# EAGLE board FX I2C Proto Shield v1.0 (EAGLE 6.4)
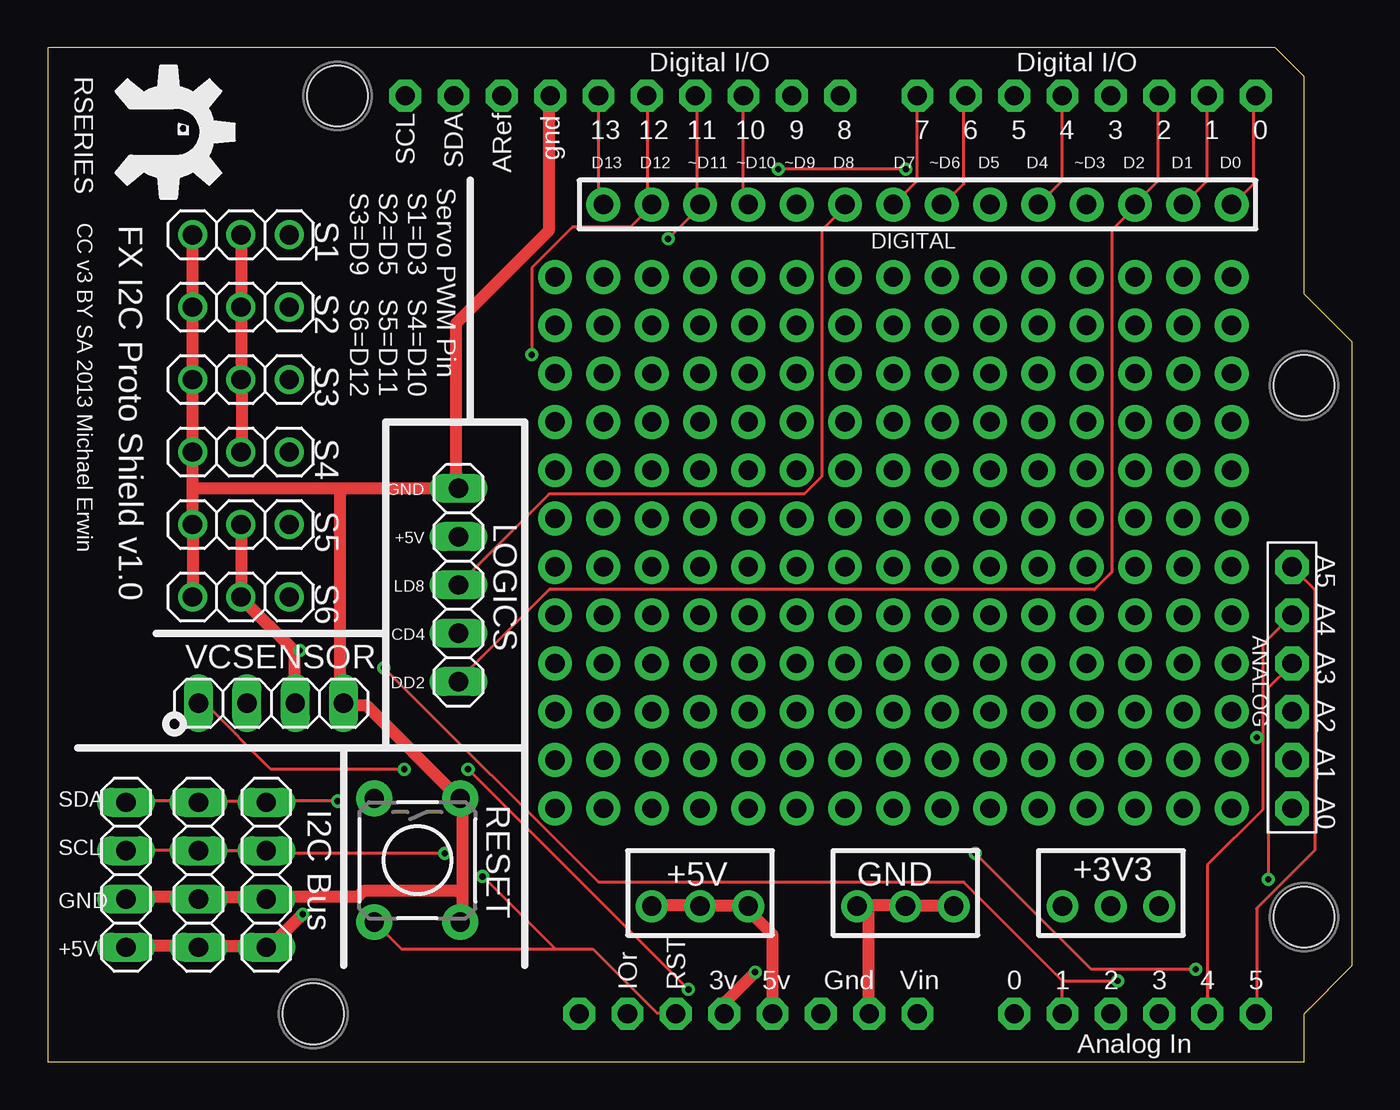
[diagram p0: board, top side]
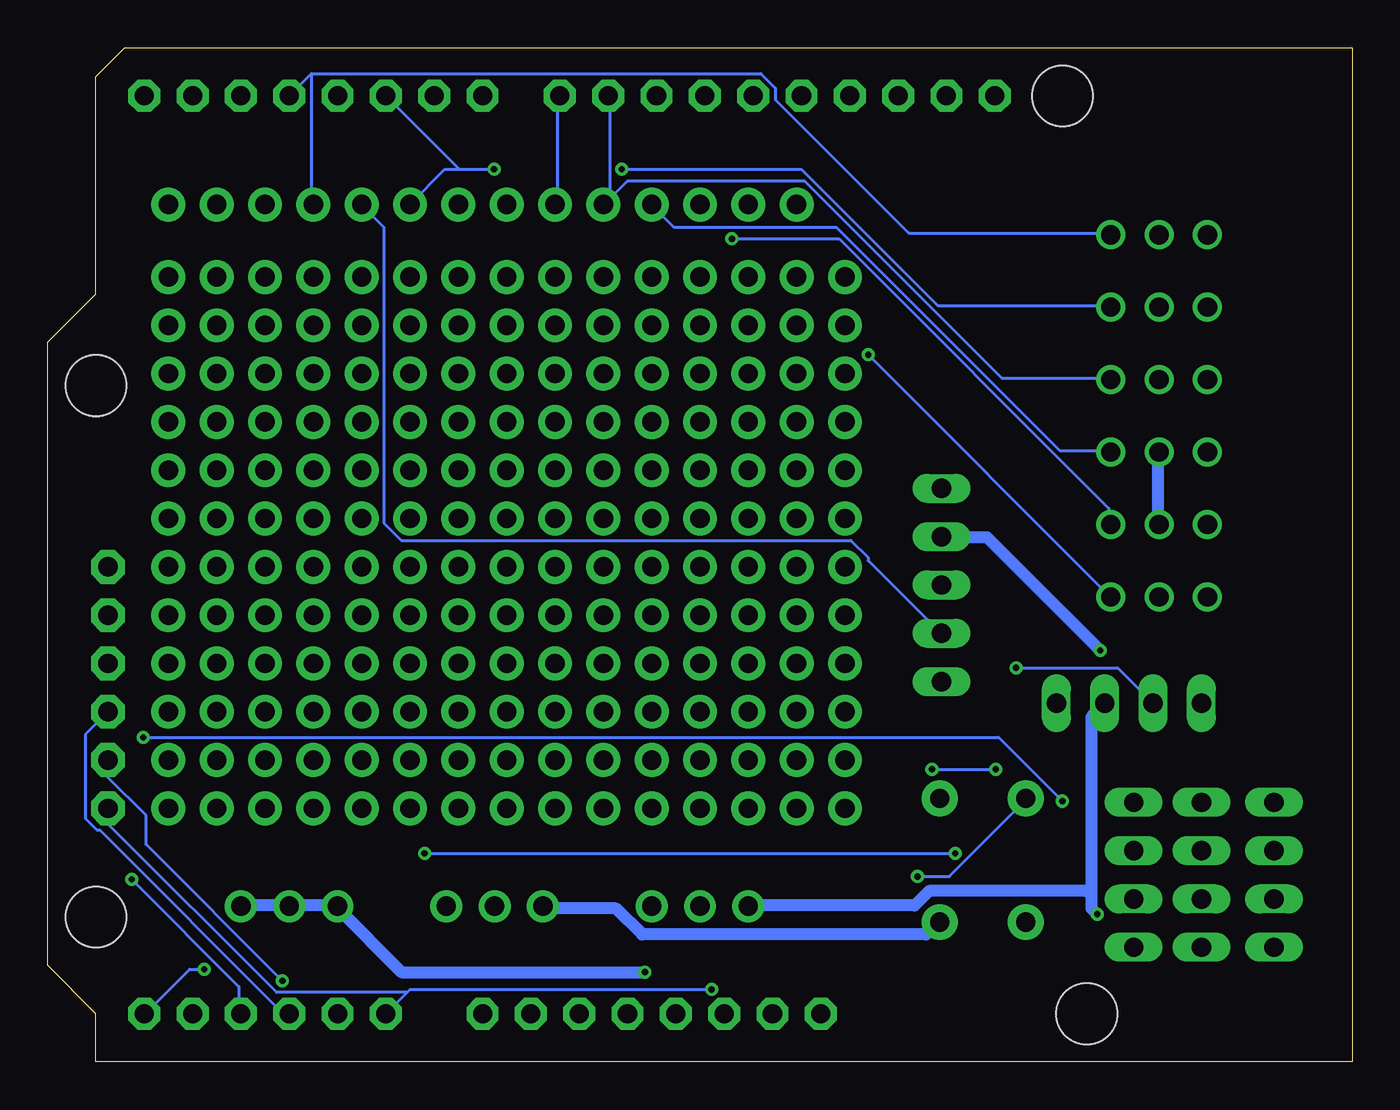
[diagram p1: board, bottom side, seen from below]

Size 68.58 x 53.34 mm. Coordinates in mm from the lower left corner, seen from the top.
Copper layers (1*16): Top 0.0356mm / dielectric 1.5011mm / Bottom 0.0356mm
Design rules "default": minimum track width 6mil, minimum drill 13mil, track to track 6mil, track to pad 6mil, pad to pad 6mil, via to via 6mil, smd to smd 6mil, copper to edge 15mil, drill to drill 6mil, minimum pad ring 7mil, minimum via ring 7mil, stop-mask expansion 4mil, vias tented up to drill 0mil, thermal gap 10mil
Net classes: 1 POWER: width 0.635 mm, clearance 0.254 mm
Holes 3.2 mm at 15.24,50.8 66.04,35.56 66.04,7.62 13.97,2.54

## Footprints (pad centres in the part's own frame; a part is rotated, then mirrored left to right if it is on the bottom)
1X03-CLEANBIG = drill 1.016 pad 1.676: 1 -2.54,0; 2 0,0; 3 2.54,0
1X06-BIG = drill 1.016 pad 1.778 octagon: 1 -6.35,0; 2 -3.81,0; 3 -1.27,0; 4 1.27,0; 5 3.81,0; 6 6.35,0
1X14-CB = drill 1.016 pad 1.778: 1 -16.51,0; 2 -13.97,0; 3 -11.43,0; 4 -8.89,0; 5 -6.35,0; 6 -3.81,0; 7 -1.27,0; 8 1.27,0; 9 3.81,0; 10 6.35,0; 11 8.89,0; 12 11.43,0; 13 13.97,0; 14 16.51,0
1X04 = drill 1.016 long: 1 -3.81,0; 2 -1.27,0; 3 1.27,0; 4 3.81,0
1X12-CB = drill 1.016 pad 1.778: 1 -13.97,0; 2 -11.43,0; 3 -8.89,0; 4 -6.35,0; 5 -3.81,0; 6 -1.27,0; 7 1.27,0; 8 3.81,0; 9 6.35,0; 10 8.89,0; 11 11.43,0; 12 13.97,0
1X05 = drill 1.016 long: 1 -5.08,0; 2 -2.54,0; 3 0,0; 4 2.54,0; 5 5.08,0
TACTILE-PTH = drill 1.016 pad 1.88: 1 -3.251,2.261; 2 3.251,2.261; 3 -3.251,-2.261; 4 3.251,-2.261
1X03 = drill 1.016: 1 -2.54,0; 2 0,0; 3 2.54,0
ARDUINOR3 = drill 1 pad 1.676 octagon: 3V 35.56,2.54; 5V 38.1,2.54; A0 50.8,2.54; A1 53.34,2.54; A2 55.88,2.54; A3 58.42,2.54; A4 60.96,2.54; A5 63.5,2.54; AREF 23.876,50.8; D0 63.5,50.8; D1 60.96,50.8; D2 58.42,50.8; D3 55.88,50.8; D4 53.34,50.8; D5 50.8,50.8; D6 48.26,50.8; D7 45.72,50.8; D8 41.656,50.8; D9 39.116,50.8; D10 36.576,50.8; D11 34.036,50.8; D12 31.496,50.8; D13 28.956,50.8; GND 26.416,50.8; GND1 43.18,2.54; GND2 40.64,2.54; IOREF 30.48,2.54; RESERVED 27.94,2.54; RESET 33.02,2.54; SCL 18.796,50.8; SDA 21.336,50.8; VIN 45.72,2.54

## Placement (x,y rotation side)
+3V3  [1X03-CLEANBIG]  55.88,8.19 0 top
+5V  [1X03-CLEANBIG]  34.29,8.19 0 top
ANALOG  [1X06-BIG]  65.41,19.68 90 top
DIGITAL  [1X14-CB]  45.72,45.09 180 top
GND  [1X03-CLEANBIG]  45.09,8.19 0 top
I2C3  [1X04]  11.49,9.84 270 top
JP1  [1X04]  4.13,9.84 270 top
JP2  [1X04]  7.94,9.84 270 top
JP3  [1X12-CB]  48.26,13.34 0 top
JP4  [1X12-CB]  48.26,15.88 0 top
JP5  [1X12-CB]  48.26,18.41 0 top
JP6  [1X12-CB]  48.26,20.95 0 top
JP7  [1X12-CB]  48.26,23.5 0 top
JP8  [1X12-CB]  48.26,26.04 0 top
JP9  [1X12-CB]  48.26,28.57 0 top
JP10  [1X12-CB]  48.26,31.11 0 top
JP11  [1X12-CB]  48.26,33.66 0 top
JP12  [1X12-CB]  48.26,36.2 0 top
JP13  [1X12-CB]  48.26,38.73 0 top
JP14  [1X12-CB]  48.26,41.27 0 top
JP15  [1X12-CB]  31.75,27.3 90 top
JP16  [1X12-CB]  29.21,27.3 90 top
JP17  [1X12-CB]  26.67,27.3 90 top
LOGICS  [1X05]  21.59,25.08 90 top
RESET  [TACTILE-PTH]  19.43,10.6 270 top
S1  [1X03]  10.16,43.5 180 top
S2  [1X03]  10.16,39.69 180 top
S3  [1X03]  10.16,35.88 180 top
S4  [1X03]  10.16,32.07 180 top
S5  [1X03]  10.16,28.26 180 top
S6  [1X03]  10.16,24.45 180 top
U1  ARDUINOR3-DIMENSION  [ARDUINOR3]  0,0 0 top
U$1  [RSERIES-OSHW-LOGO-LARGE]  6.35,48.9 270 top
VCSENSOR  [1X04]  11.75,18.86 0 top

## Library data of the parts
+3V3 +5V ANALOG DIGITAL GND JP3-JP17 S1-S6 U1 = adafruit
I2C3 JP1 JP2 LOGICS VCSENSOR = pinhead
RESET = SparkFun-Electromechanical
U$1 = rseries

## Nets
+3V3 [POWER]: +3V3.1 +3V3.2 +3V3.3 U1.3V
+5V [POWER]: +5V.1 +5V.2 +5V.3 I2C3.4 JP1.4 JP2.4 LOGICS.4 S1.2 S2.2 S3.2 S4.2 S5.2 S6.2 U1.5V VCSENSOR.3
GND [POWER]: GND.1 GND.2 GND.3 I2C3.3 JP1.3 JP2.3 LOGICS.5 RESET.1 RESET.2 S1.3 S2.3 S3.3 S4.3 S5.3 S6.3 U1.GND U1.GND1 VCSENSOR.4
GND2: U1.GND2
N$1: ANALOG.1 U1.A0 VCSENSOR.1
N$2: DIGITAL.9 LOGICS.3 U1.D8
N$3: ANALOG.2 U1.A1 VCSENSOR.2
N$4: DIGITAL.4 S1.1 U1.D3
N$5: DIGITAL.6 S2.1 U1.D5
N$6: DIGITAL.10 S3.1 U1.D9
N$7: DIGITAL.11 S4.1 U1.D10
N$8: DIGITAL.12 S5.1 U1.D11
N$9: DIGITAL.13 S6.1 U1.D12
N$10: DIGITAL.5 LOGICS.2 U1.D4
N$11: DIGITAL.3 LOGICS.1 U1.D2
N$12: RESET.3 RESET.4 U1.RESET
N$14: ANALOG.3 U1.A2
N$15: ANALOG.6 I2C3.2 JP1.2 JP2.2 U1.A5
N$16: ANALOG.5 I2C3.1 JP1.1 JP2.1 U1.A4
N$17: ANALOG.4 U1.A3
N$18: DIGITAL.1 U1.D0
N$19: DIGITAL.2 U1.D1
N$21: DIGITAL.7 U1.D6
N$22: DIGITAL.8 U1.D7
N$28: DIGITAL.14 U1.D13
VIN: U1.VIN

## Tracks (layer width: path | path; a pad name or v marks a point on that pad's centre or on a via)
+3V3  (via drill 0.33)
  Top 0.635: v37.19,4.72 35.66,3.2 35.66,2.59 U1.3V
  Bottom 0.635: v37.19,4.72 49.99,4.72 53.34,8.08 +3V3.1 53.65,8.23 55.78,8.23 +3V3.2 56.08,8.23 58.37,8.23 +3V3.3
+5V  (via drill 0.33)
  Top 0.635: +5V.1 31.85,8.23 34.29,8.23 +5V.2 34.59,8.23 36.73,8.23 +5V.3 36.88,7.92 38.1,6.71 38.1,2.59 U1.5V | S4.2 10.21,32.16 10.21,35.81 S3.2 10.21,36.12 10.21,39.62 S2.2 10.21,39.93 10.21,43.43 S1.2 | JP1.4 4.27,6.1 7.92,6.1 JP2.4 8.23,6.1 11.43,6.1 I2C3.4 11.73,6.1 v13.41,7.77 | 12.95,21.64 12.95,18.9 VCSENSOR.3 | 12.95,21.64 10.21,24.38 S6.2 10.21,24.69 10.21,28.19 S5.2 | v13.26,21.64 12.95,21.64
  Bottom 0.635: v13.26,21.64 19.2,27.58 21.49,27.58 LOGICS.4 | v13.41,7.77 13.72,8.08 13.72,8.99 | 13.72,8.99 13.72,18.14 13.11,18.75 VCSENSOR.3 | S4.2 10.21,32 10.21,28.35 S5.2 | +5V.1 31.7,8.23 23.01,8.23 22.25,8.99 14.02,8.99 13.72,8.99
GND
  Top 0.635: S6.3 7.62,24.54 7.62,28.19 S5.3 7.62,28.5 7.62,30.18 | 7.62,30.18 7.62,32 S4.3 7.62,32.31 7.62,35.81 S3.3 7.62,36.12 7.62,39.62 S2.3 7.62,39.93 7.62,43.43 S1.3 | 15.39,30.18 7.92,30.18 7.62,30.18 | 15.39,30.18 21.49,30.18 LOGICS.5 21.49,30.48 21.49,38.86 26.36,43.74 26.36,50.75 U1.GND | U1.GND1 43.13,2.59 43.13,7.92 GND.1 42.67,8.23 44.96,8.23 GND.2 45.41,8.23 47.55,8.23 GND.3 | JP1.3 4.27,8.69 7.92,8.69 JP2.3 8.23,8.69 11.43,8.69 I2C3.3 11.73,8.69 16.31,8.69 16.61,8.99 21.49,8.99 21.79,8.99 | 21.79,8.99 21.79,13.56 RESET.1 21.64,13.87 16.76,18.75 15.7,18.75 VCSENSOR.4 15.39,19.05 15.39,29.87 15.39,30.18 | 21.79,8.99 21.79,7.47 RESET.2
  Bottom 0.635: GND.1 42.52,8.08 38.71,8.08 37.34,6.71 22.4,6.71 21.79,7.32 RESET.2
N$1  (via drill 0.33)
  Top 0.152: v18.75,15.39 11.73,15.39 8.38,18.75 8.08,18.75 VCSENSOR.1 | v33.68,3.81 v22.1,15.39
  Bottom 0.152: v22.1,15.39 v18.75,15.39 | v33.68,3.81 49.53,3.81 49.68,3.66 | 49.68,3.66 50.75,2.59 U1.A0 | 49.68,3.66 56.54,3.66 65.38,12.5 65.38,13.26 ANALOG.1
N$2
  Top 0.152: LOGICS.3 21.64,25.15 26.36,29.87 39.78,29.87 40.69,30.79 40.69,43.74 41.91,44.96 DIGITAL.9
  Bottom 0.152: U1.D8 41.76,50.75 41.76,45.26 41.91,45.11 DIGITAL.9
N$3  (via drill 0.33)
  Top 0.152: v17.68,20.73 28.96,9.45 48.16,9.45 53.34,4.27 | 53.34,4.27 53.34,2.59 U1.A1 | 53.34,4.27 v56.24,4.27
  Bottom 0.152: v17.68,20.73 12.34,20.73 10.52,18.9 VCSENSOR.2 | v56.24,4.27 63.4,11.43 63.4,12.95 65.38,14.94 65.38,15.85 ANALOG.2
N$4
  Bottom 0.152: 54.71,51.97 31.09,51.97 30.33,51.21 30.33,50.6 23.32,43.59 12.8,43.59 S1.1 | 54.71,51.97 55.78,50.9 U1.D3 | 54.71,51.97 54.71,45.11 DIGITAL.4
N$5  (via drill 0.33)
  Top 0.152: v45.11,46.94 v38.41,46.94
  Bottom 0.152: v38.41,46.94 28.96,46.94 21.79,39.78 12.8,39.78 S2.1 | 46.94,46.94 47.7,46.94 49.53,45.11 DIGITAL.6 | 46.94,46.94 v45.11,46.94 | 46.94,46.94 50.75,50.75 U1.D5
N$6
  Bottom 0.152: 39.01,45.41 39.32,45.11 DIGITAL.10 39.01,45.41 | 39.01,45.41 38.1,46.33 28.8,46.33 18.44,35.97 12.8,35.97 S3.1 | 39.01,45.41 39.01,50.75 U1.D9
N$7
  Top 0.152: U1.D10 36.58,50.75 36.58,45.26 36.73,45.11 DIGITAL.11
  Bottom 0.152: S4.1 12.8,32.16 15.39,32.16 27.13,43.89 35.66,43.89 36.73,44.96 DIGITAL.11
N$8  (via drill 0.33)
  Top 0.152: 34.14,44.81 34.29,44.96 DIGITAL.12 34.14,44.81 | 34.14,44.81 v32.61,43.28 | 34.14,44.81 34.14,50.75 U1.D11
  Bottom 0.152: v32.61,43.28 26.98,43.28 12.8,29.11 12.8,28.35 S5.1
N$9  (via drill 0.33)
  Top 0.152: v25.45,37.19 25.45,41.76 27.58,43.89 30.63,43.89 31.55,44.81 | 31.55,44.81 31.7,44.96 DIGITAL.13 31.55,44.81 | 31.55,44.81 31.55,50.75 U1.D12
  Bottom 0.152: v25.45,37.19 12.8,24.54 S6.1
N$10
  Top 0.152: U1.D4 53.34,50.75 53.34,46.33 52.12,45.11 DIGITAL.5
  Bottom 0.152: LOGICS.2 21.64,22.55 25.45,26.36 25.45,26.52 26.36,27.43 49.99,27.43 50.9,28.35 50.9,43.89 51.97,44.96 DIGITAL.5
N$11
  Top 0.152: LOGICS.1 21.64,20.12 26.36,24.84 55.02,24.84 55.93,25.76 55.93,43.74 57.15,44.96 DIGITAL.3 57.15,45.11 58.37,46.33 58.37,50.75 U1.D2
N$12  (via drill 0.33)
  Top 0.152: 26.67,5.94 18.59,5.94 17.22,7.32 RESET.4 | 26.67,5.94 28.65,5.94 32,2.59 32.92,2.59 U1.RESET | 26.67,5.94 v22.86,9.75
  Bottom 0.152: v22.86,9.75 21.18,9.75 17.22,13.72 RESET.3
N$14
  Bottom 0.152: U1.A2 55.93,2.59 56.24,2.59 65.84,12.19 65.99,12.19 66.6,12.8 66.6,17.22 65.53,18.29 ANALOG.3
N$15  (via drill 0.33)
  Top 0.152: JP1.2 4.27,11.12 7.92,11.12 JP2.2 8.08,11.12 11.43,11.12 I2C3.2 11.58,10.97 v20.88,10.97 | U1.A5 63.55,2.59 63.55,8.08 66.6,11.12 66.6,24.84 65.53,25.91 ANALOG.6 | v48.77,10.97 54.86,4.88 v60.35,4.88
  Bottom 0.152: v48.77,10.97 v20.88,10.97 | v60.35,4.88 61.11,4.88 63.4,2.59 U1.A5
N$16  (via drill 0.33)
  Top 0.152: JP1.1 4.27,13.72 7.92,13.72 JP2.1 8.08,13.72 11.43,13.72 I2C3.1 11.58,13.72 v15.24,13.72 | 63.86,17.07 63.86,21.95 65.38,23.47 ANALOG.5 | 63.86,17.07 63.86,13.26 60.96,10.36 60.96,2.59 U1.A4 | 63.86,17.07 v63.55,17.07
  Bottom 0.152: v15.24,13.72 18.59,17.07 v63.55,17.07
N$17  (via drill 0.33)
  Top 0.152: v64.16,9.6 64.16,19.66 65.38,20.88 ANALOG.4
  Bottom 0.152: v64.16,9.6 58.52,3.96 58.52,2.59 U1.A3
N$18
  Top 0.152: U1.D0 63.4,50.75 63.4,46.18 62.33,45.11 DIGITAL.1
N$19
  Top 0.152: U1.D1 60.96,50.75 60.96,46.33 59.74,45.11 DIGITAL.2
N$21
  Top 0.152: U1.D6 48.16,50.75 48.16,46.18 47.09,45.11 DIGITAL.7
N$22
  Top 0.152: U1.D7 45.72,50.75 45.72,46.33 44.5,45.11 DIGITAL.8
N$28
  Top 0.152: U1.D13 28.96,50.75 28.96,45.26 29.11,45.11 DIGITAL.14

## Text on the board
_tsilk: RSERIES | D13 | D12 | ~D11 | ~D10 | ~D9 | D8 | D7 | ~D6 | D5 | D4 | ~D3 | D2 | D1 | D0 | S3=D9 | S2=D5 | S1=D3 | SDA | Servo PWM Pin | CC v3 BY SA 2013 Michael Erwin | FX I2C Proto Shield v1.0 | DIGITAL | S6=D12 | S5=D11 | S4=D10 | GND | +5V | A5 | LD8 | A4 | CD4 | A3 | DD2 | A2 | A1 | A0 | SDA | I2C Bus | SCL | GND | +5V